# Altium PCB PCB1.pcbdoc (part 1 of 2)
Units mil, origin at the board's own origin, x right, y up, seen from the top; angles counter-clockwise.
Board outline 5555 x 3675 mil, 2 copper layers (Top Layer, Bottom Layer); 152 components, 190 nets, 571 pads, 310 vias.
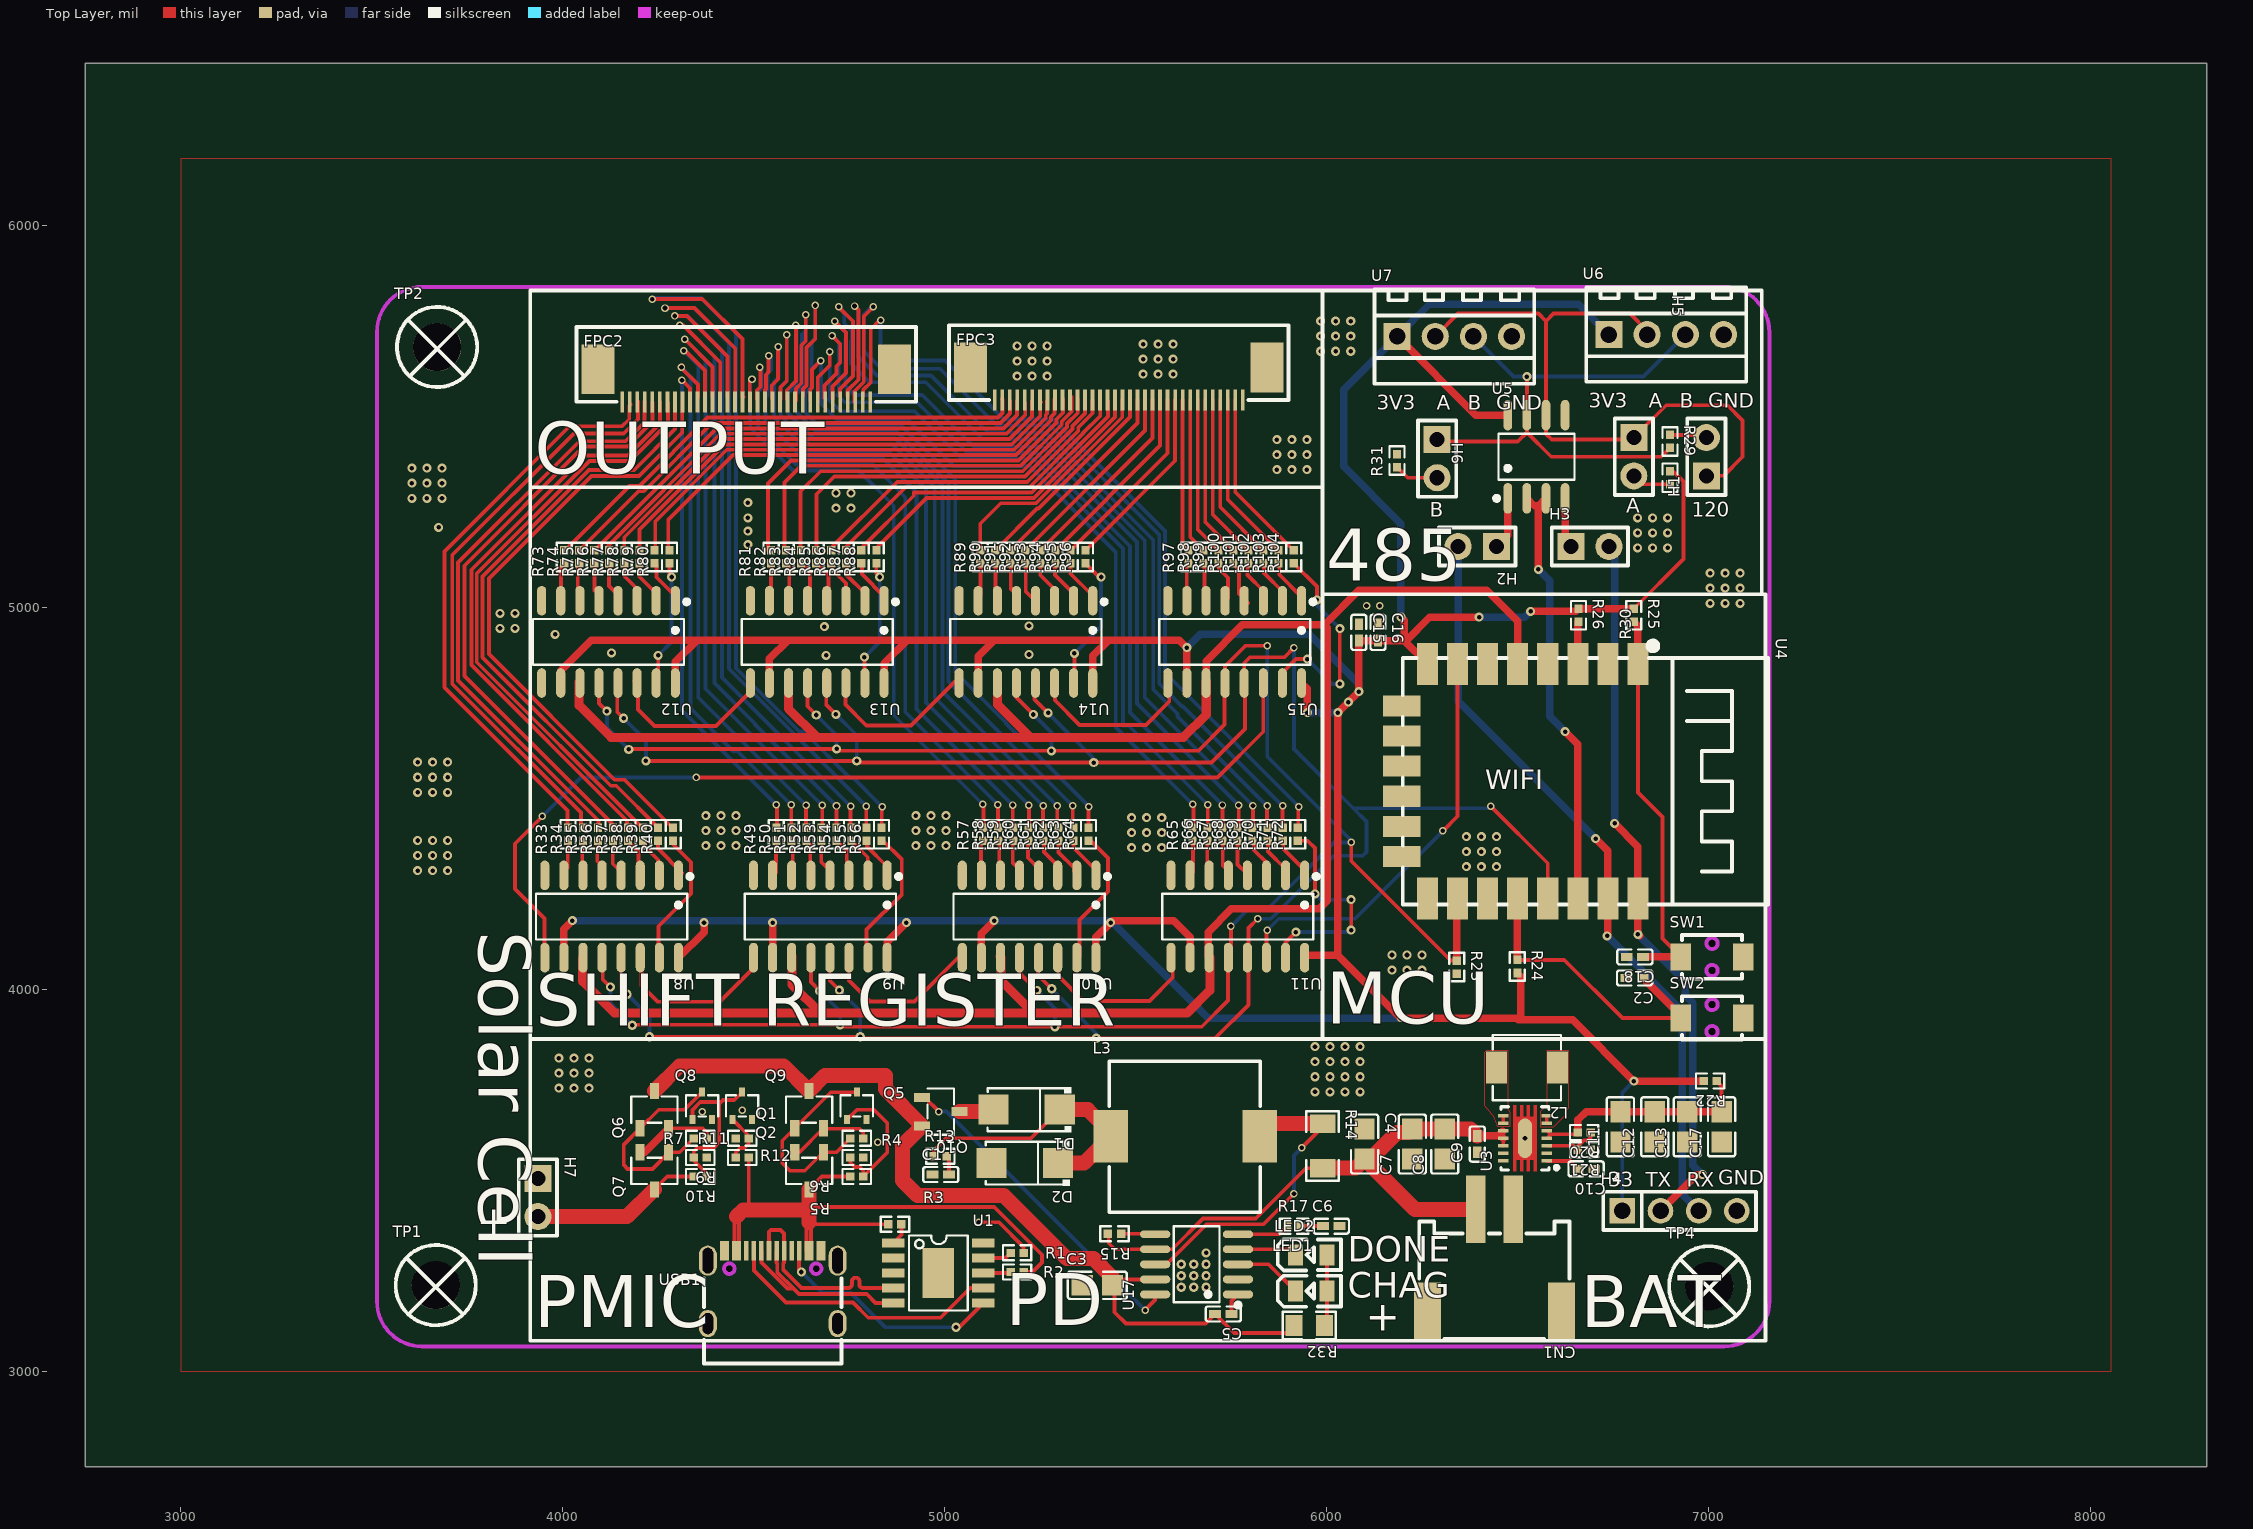
[diagram p0: Top Layer view]
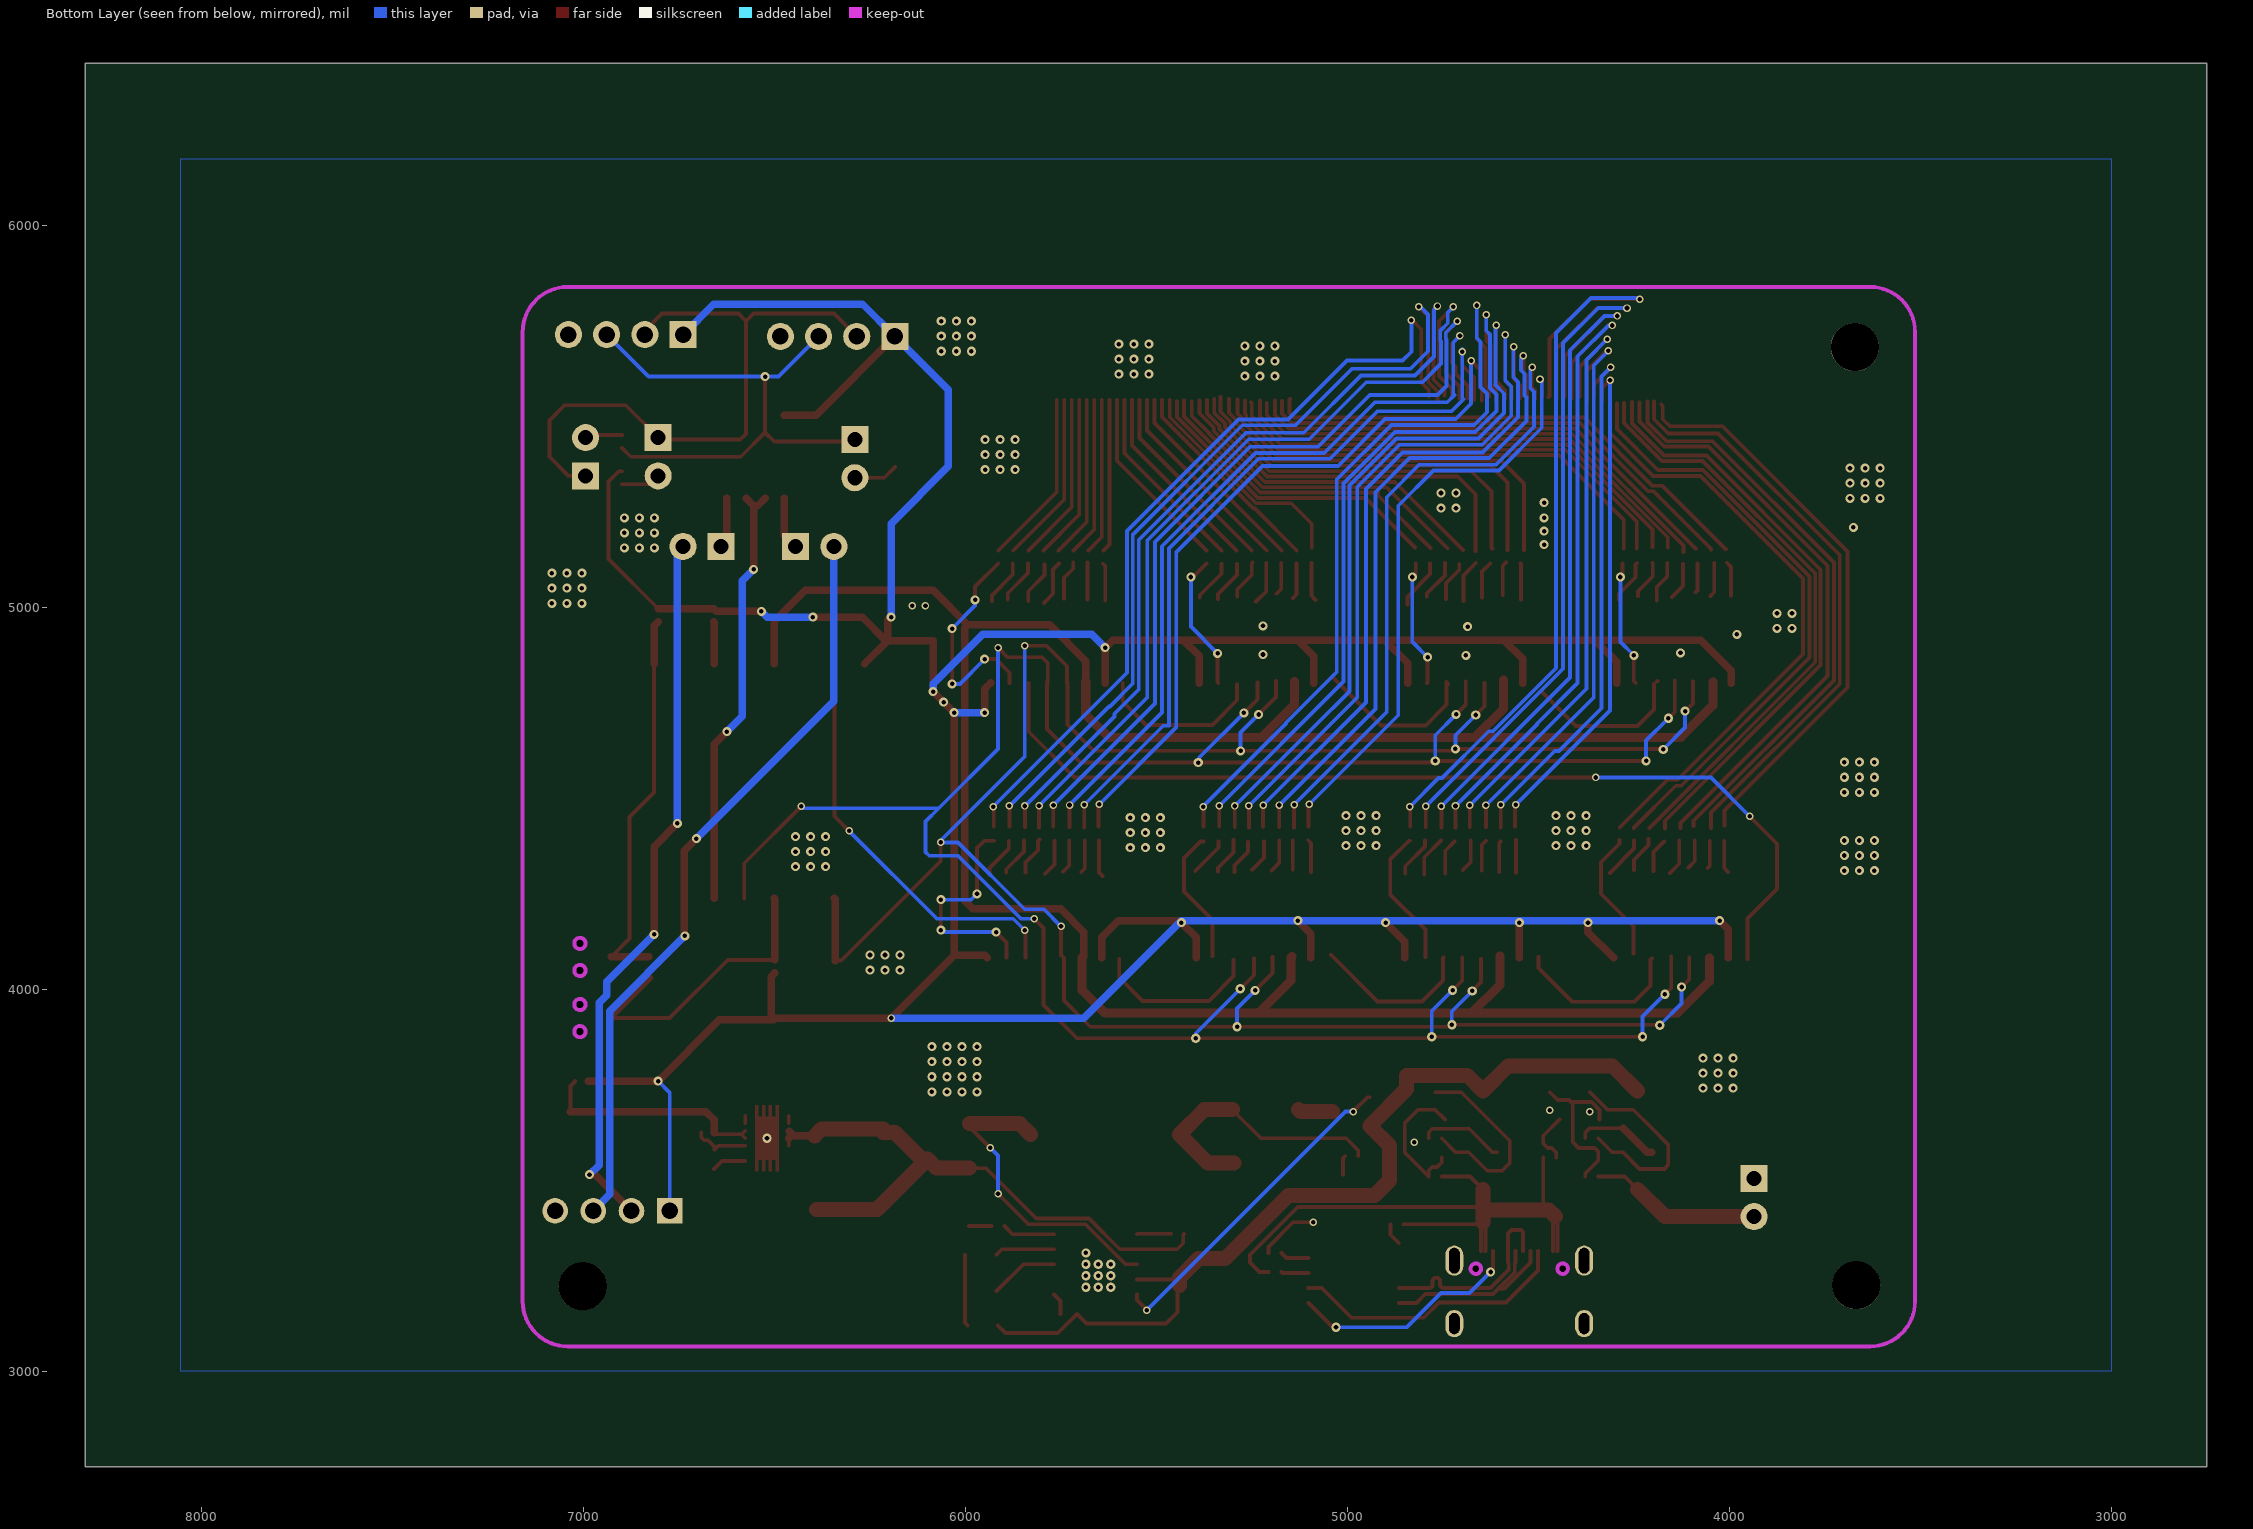
[diagram p1: Bottom Layer view, seen from below]

## Layer stack, top to bottom
Top Layer: signal copper (thickness not stored)
Dielectric: dielectric 12.6, FR-4, Dk 4.8
Bottom Layer: signal copper (thickness not stored)

## Board outline
8305,2750 2750,2750 2750,6425 8305,6425

## Design rules (kind name [scope] priority, off if disabled: settings)
Clearance copperThickness1oz [All] p1: gap=7 ignorepadtopadclearanceinfootprint=FALSE except(4: Track-Track; 6: Track-SMDPad SMDPad-SMDPad Track-THPad SMDPad-THPad THPad-THPad Track-Via SMDPad-Via THPad-Via Via-Via Track-Fill SMDPad-Fill THPad-Fill Via-Fill Fill-Fill SMDPad-Region THPad-Region Via-Region Fill-Region Region-Region Track-Poly SMDPad-Poly THPad-Poly Via-Poly Fill-Poly Poly-Poly Track-Text SMDPad-Text THPad-Text Via-Text Fill-Text Region-Text Poly-Text Text-Text Track-Hole SMDPad-Hole THPad-Hole Via-Hole Fill-Hole Region-Hole Poly-Hole Text-Hole; 11.8: Track-Region Region-Poly Track-Sheet SMDPad-Sheet THPad-Sheet Via-Sheet Fill-Sheet Region-Sheet Poly-Sheet Text-Sheet Sheet-Hole)
Clearance copperThickness2oz [All] p1: gap=7 ignorepadtopadclearanceinfootprint=FALSE except(6: Track-SMDPad SMDPad-SMDPad Track-THPad SMDPad-THPad THPad-THPad Track-Via SMDPad-Via THPad-Via Via-Via Track-Fill SMDPad-Fill THPad-Fill Via-Fill Fill-Fill SMDPad-Region THPad-Region Via-Region Fill-Region Region-Region Track-Poly SMDPad-Poly THPad-Poly Via-Poly Fill-Poly Poly-Poly Track-Text SMDPad-Text THPad-Text Via-Text Fill-Text Region-Text Poly-Text Text-Text Track-Hole SMDPad-Hole THPad-Hole Via-Hole Fill-Hole Region-Hole Poly-Hole Text-Hole; 8: Track-Track; 11.8: Track-Region Region-Poly Track-Sheet SMDPad-Sheet THPad-Sheet Via-Sheet Fill-Sheet Region-Sheet Poly-Sheet Text-Sheet Sheet-Hole)
DiffPairsRouting differentialPair [All] p1: maxuncoupledlength=10 minlimit=0 maxlimit=5.9843 mostfreqgap=5.9843 toplayer_minwidth=5 toplayer_prefwidth=10 toplayer_maxwidth=100 bottomlayer_minwidth=5 bottomlayer_prefwidth=10 bottomlayer_maxwidth=100
PasteMaskExpansion pasteMaskExpansion [All] p1: expansion=0
PlaneConnect innerPlane [All] p1: planeconnectstyle=Relief reliefexpansion=20 reliefentries=4 reliefconductorwidth=10 reliefairgap=10
PolygonConnect copperRegion [All] p1: connectstyle=Direct reliefentries=4 reliefconductorwidth=10 polygonreliefangle="90 Angle" airgapwidth=10
RoutingVias viaSize [All] p1: viastyle="Through Hole" holewidth=12.0078 minholewidth=11.811 maxholewidth=248.0314 width=24.0158 minwidth=19.685 maxwidth=393.7008
SolderMaskExpansion solderMaskExpansion [All] p1: useseparateexpansions=TRUE expansion=2.0079 expansionbottom=2.0079
Width copperThickness1oz [All] p1: maxlimit=100 minlimit=5 preferedwidth=10
Width copperThickness2oz [All] p1: maxlimit=100 minlimit=8 preferedwidth=10

## Components (designator, comment, footprint, x,y, rotation, side; value= is the part's Value field where it differs from the comment)
C1 "CAP_0402" C0402 4990,3515 r0 top
C2 "CAP_0402" C0402 6807.08,4030 r180 top
C3 "CAP_0805" C0805 5400,3225 r0 top
C4 "CAP_0805" C0805 6100,3595 r270 top
C5 "CAP_0402" C0402 5730,3150 r180 top
C6 "CAP_0402" C0402 6012.92,3380 r0 top
C7 "CAP_0805" C0805 6225,3595 r90 top
C8 "CAP_0805" C0805 6310,3595 r90 top
C9 "CAP_0402" C0402 6395,3595 r90 top
C10 "CAP_0402" C0402 6680,3530 r180 top
C11 "CAP_0805" C0805 6770,3640 r90 top
C12 "CAP_0805" C0805 6860,3640 r90 top
C13 "CAP_0805" C0805 6945,3640 r90 top
C15 "CAP_0402" C0402 6085,4935 r270 top
C16 "CAP_0402" C0402 6135,4935 r270 top
C17 "CAP_0805" C0805 7035,3640 r90 top
C18 "CAP_0402" C0402 6807.92,4085 r180 top
CN1 "HCZZ0021-2" CONN-SMD_2P-P2.50-A2501-WF-02A 6440,3290 r180 top
D1 "B340A" SMA_L4.3-W2.6-LS5.1-RD 5215,3685 r180 top
D2 "B340A" SMA_L4.3-W2.6-LS5.1-RD 5210,3545 r180 top
FPC2 "AFC07-S34FCC-00" FPC-SMD_P0.50-34P_LCSXJ-H2.0 4480.58,5581.57 r0 top
FPC3 "AFC07-S34FCC-00" FPC-SMD_P0.50-34P_LCSXJ-H2.0 5456.15,5586.01 r0 top
H1 "HDR-M_2.54_1x2P" HDR-TH_2P-P2.54-V-M-1 6995,5395 r90 top
H2 "HDR-M_2.54_1x2P" HDR-TH_2P-P2.54-V-M-1 6395,5160 r180 top
H3 "HDR-M_2.54_1x2P" HDR-TH_2P-P2.54-V-M-1 6690,5160 r0 top
H4 "HDR-M_2.54_1x4P" HDR-TH_4P-P2.54-V-M 6925,3420 r0 top
H5 "HDR-M_2.54_1x2P" HDR-TH_2P-P2.54-V-M-1 6805,5395 r270 top
H6 "HDR-M_2.54_1x2P" HDR-TH_2P-P2.54-V-M-1 6290,5390 r270 top
H7 "HDR-M_2.54_1x2P" HDR-TH_2P-P2.54-V-M-1 3935,3455 r270 top
L2 "MWSA0402S-2R2MT" IND-SMD_L4.4-W4.2 6525,3795 r180 top
L3 "YDRH104R-390M" IND-SMD_L10.1-W10.0 5630,3615 r0 top
LED1 "NCD0805R1" LED0805-R-RD 5960,3210 r0 top
LED2 "NCD0805R1" LED0805-R-RD 5960,3305 r0 top
Q1 "APM2301CAC-TRG" SOT-23-3_L2.9-W1.6-P1.90-LS2.8-BR 4645,3685 r270 top
Q2 "APM2301CAC-TRG" SOT-23-3_L2.9-W1.6-P1.90-LS2.8-BR 4645,3525 r90 top
Q5 "L2N7002WT1G" SC-70-3_L2.1-W1.3-P1.30-LS2.1-BR 4770,3695 r270 top
Q6 "APM2301CAC-TRG" SOT-23-3_L2.9-W1.6-P1.90-LS2.8-BR 4240,3685 r270 top
Q7 "APM2301CAC-TRG" SOT-23-3_L2.9-W1.6-P1.90-LS2.8-BR 4240,3525 r90 top
Q8 "L2N7002WT1G" SC-70-3_L2.1-W1.3-P1.30-LS2.1-BR 4365,3695 r270 top
Q9 "L2N7002WT1G" SC-70-3_L2.1-W1.3-P1.30-LS2.1-BR 4470,3695 r270 top
Q10 "APM2301CAC-TRG" SOT-23-3_L2.9-W1.6-P1.90-LS2.8-BR 4990,3680 r180 top
R1 "Res_0402" R0402 5190,3310 r180 top
R2 "Res_0402" R0402 5190,3260 r180 top
R3 "Res_0402" R0402 4870,3385 r180 top
R4 "Res_0402" R0402 4770,3610 r0 top
R5 "Res_0402" R0402 4770,3510 r180 top
R6 "Res_0402" R0402 4770,3560 r180 top
R7 "Res_0402" R0402 4360,3610 r0 top
R9 "Res_0402" R0402 4360,3560 r180 top
R10 "Res_0402" R0402 4360,3510 r180 top
R11 "Res_0402" R0402 4470,3610 r0 top
R12 "Res_0402" R0402 4470,3560 r0 top
R13 "Res_0402" R0402 4988.9,3563.16 r0 top
R14 "Res_1206" R1206 5990,3590 r270 top
R15 "Res_0402" R0402 5445,3360 r180 top
R17 "Res_0402" R0402 5915,3380 r0 top
R20 "Res_0402" R0402 6675,3625 r180 top
R21 "Res_0402" R0402 6675,3580 r180 top
R22 "Res_0402" R0402 7005,3760 r180 top
R23 "Res_0402" R0402 6341.44,4058.56 r270 top
R24 "Res_0402" R0402 6500,4060 r270 top
R25 "Res_0402" R0402 6805,4980 r270 top
R26 "Res_0402" R0402 6660,4980 r270 top
R29 "Res_0402" R0402 6900,5435 r270 top
R30 "Res_0402" R0402 6900,5340 r90 top
R31 "Res_0402" R0402 6185,5385 r90 top
R32 "0805W8F4701T5E" R0805 5955,3120 r180 top
R33 "Res_0402" R0402 4013.52,4406.31 r90 top
R34 "Res_0402" R0402 4052.89,4406.31 r90 top
R35 "Res_0402" R0402 4092.26,4406.31 r90 top
R36 "Res_0402" R0402 4131.63,4406.31 r90 top
R37 "Res_0402" R0402 4171,4406.31 r90 top
R38 "Res_0402" R0402 4210.37,4406.31 r90 top
R39 "Res_0402" R0402 4249.74,4406.31 r90 top
R40 "Res_0402" R0402 4289.11,4406.31 r90 top
R49 "Res_0402" R0402 4559.37,4406.31 r90 top
R50 "Res_0402" R0402 4598.74,4406.31 r90 top
R51 "Res_0402" R0402 4638.11,4406.31 r90 top
R52 "Res_0402" R0402 4677.48,4406.31 r90 top
R53 "Res_0402" R0402 4716.85,4406.31 r90 top
R54 "Res_0402" R0402 4756.22,4406.31 r90 top
R55 "Res_0402" R0402 4795.59,4406.31 r90 top
R56 "Res_0402" R0402 4834.96,4406.31 r90 top
R57 "Res_0402" R0402 5101.29,4406.31 r90 top
R58 "Res_0402" R0402 5140.66,4406.31 r90 top
R59 "Res_0402" R0402 5180.03,4406.31 r90 top
R60 "Res_0402" R0402 5219.4,4406.31 r90 top
R61 "Res_0402" R0402 5258.77,4406.31 r90 top
R62 "Res_0402" R0402 5298.14,4406.31 r90 top
R63 "Res_0402" R0402 5337.51,4406.31 r90 top
R64 "Res_0402" R0402 5376.88,4406.31 r90 top
R65 "Res_0402" R0402 5649.43,4406.31 r90 top
R66 "Res_0402" R0402 5688.8,4406.31 r90 top
R67 "Res_0402" R0402 5728.17,4406.31 r90 top
R68 "Res_0402" R0402 5767.54,4406.31 r90 top
R69 "Res_0402" R0402 5806.91,4406.31 r90 top
R70 "Res_0402" R0402 5846.28,4406.31 r90 top
R71 "Res_0402" R0402 5885.65,4406.31 r90 top
R72 "Res_0402" R0402 5925.02,4406.31 r90 top
R73 "Res_0402" R0402 4003.82,5132.65 r90 top
R74 "Res_0402" R0402 4043.19,5132.65 r90 top
R75 "Res_0402" R0402 4082.56,5132.65 r90 top
R76 "Res_0402" R0402 4121.93,5132.65 r90 top
R77 "Res_0402" R0402 4161.31,5132.65 r90 top
R78 "Res_0402" R0402 4200.68,5132.65 r90 top
R79 "Res_0402" R0402 4240.05,5132.65 r90 top
R80 "Res_0402" R0402 4279.42,5132.65 r90 top
R81 "Res_0402" R0402 4545.63,5132.65 r90 top
R82 "Res_0402" R0402 4585,5132.65 r90 top
R83 "Res_0402" R0402 4624.37,5132.65 r90 top
R84 "Res_0402" R0402 4663.74,5132.65 r90 top
R85 "Res_0402" R0402 4703.11,5132.65 r90 top
R86 "Res_0402" R0402 4742.48,5132.65 r90 top
R87 "Res_0402" R0402 4781.85,5132.65 r90 top
R88 "Res_0402" R0402 4821.22,5132.65 r90 top
R89 "Res_0402" R0402 5093.26,5132.65 r90 top
R90 "Res_0402" R0402 5132.63,5132.65 r90 top
R91 "Res_0402" R0402 5172,5132.65 r90 top
R92 "Res_0402" R0402 5211.37,5132.65 r90 top
R93 "Res_0402" R0402 5250.74,5132.65 r90 top
R94 "Res_0402" R0402 5290.11,5132.65 r90 top
R95 "Res_0402" R0402 5329.48,5132.65 r90 top
R96 "Res_0402" R0402 5368.85,5132.65 r90 top
R97 "Res_0402" R0402 5638.78,5132.65 r90 top
R98 "Res_0402" R0402 5678.15,5132.65 r90 top
R99 "Res_0402" R0402 5717.52,5132.65 r90 top
R100 "Res_0402" R0402 5756.89,5132.65 r90 top
R101 "Res_0402" R0402 5796.26,5132.65 r90 top
R102 "Res_0402" R0402 5835.63,5132.65 r90 top
R103 "Res_0402" R0402 5875,5132.65 r90 top
R104 "Res_0402" R0402 5914.37,5132.65 r90 top
SW1 "TS-KG88C-ACT25F" KEY-SMD_L4.0-W2.9-LS4.8 7010,4085 r0 top
SW2 "TS-KG88C-ACT25F" KEY-SMD_L4.0-W2.9-LS4.8 7010,3925 r0 top
TP1 "M3螺丝" M3螺丝 3669.88,3223.03 r0 top
TP2 "M3螺丝" M3螺丝 3673.37,5679.82 r0 top
TP4 "M3螺丝" M3螺丝 7005.02,3219.98 r0 top
U1 "CH224K" ESSOP-10_L4.9-W3.9-P1.0-LS6.0-TL-EP 4983.66,3257.37 r270 top
U3 "TPS63020DSJT" VSON-14_L4.0-W3.0-P0.50-BL-EP_TI_DSJ 6520,3610 r90 top
U4 "SMDESP8266-12F" WIFIM-SMD_22P-L24.0-W16.0-P2.00-SMDESP8266-12F 6506.83,4545.23 r270 top
U5 "MAX3485ESA" SOP-8_L5.0-W4.0-P1.27-LS6.0-BL 6550,5395 r0 top
U6 "DB125-2.54-4P-GN-S" CONN-TH_DB125-2.54-4P-GN 6890,5715 r0 top
U7 "DB125-2.54-4P-GN-S" CONN-TH_DB125-2.54-4P-GN 6335,5710 r0 top
U8 "74HC595D_C431479" SOIC-16_L9.9-W3.9-P1.27-LS6.0-BL 4127.99,4190.85 r180 top
U9 "74HC595D_C431479" SOIC-16_L9.9-W3.9-P1.27-LS6.0-BL 4674.66,4190.85 r180 top
U10 "74HC595D_C431479" SOIC-16_L9.9-W3.9-P1.27-LS6.0-BL 5221.33,4190.85 r180 top
U11 "74HC595D_C431479" SOIC-16_L9.9-W3.9-P1.27-LS6.0-BL 5767.99,4190.85 r180 top
U12 "74HC595D_C431479" SOIC-16_L9.9-W3.9-P1.27-LS6.0-BL 4119.72,4910.16 r180 top
U13 "74HC595D_C431479" SOIC-16_L9.9-W3.9-P1.27-LS6.0-BL 4666.39,4910.16 r180 top
U14 "74HC595D_C431479" SOIC-16_L9.9-W3.9-P1.27-LS6.0-BL 5213.05,4910.16 r180 top
U15 "74HC595D_C431479" SOIC-16_L9.9-W3.9-P1.27-LS6.0-BL 5759.72,4910.16 r180 top
U17 "CN3781" SSOP-10_L4.9-W3.9-P1.00-LS6.0-BL 5660,3280 r90 top
USB1 "USB_TYPE-C-16P" USB_TYPE-C-16P 4545,3220 r0 top

## Footprints (in the part's own frame and the unit in brackets; to place one, negate y for a bottom-side part, rotate by r counter-clockwise, add the part's x,y. Pads: shape width x height; smd on the part's side, far side on the other; paste and mask are expansions set on the pad)
C0402 [mm]
  rect 0.79x0.54 smd: 1(-0.545,0) 2(0.545,0)
  silkscreen extent -1.17,-0.5 1.17,0.5
C0805 [mm]
  rect 1.41x1.35 smd: 1(-1,0) 2(1,0)
  silkscreen extent -1.96,-0.9 1.96,0.9
CONN-SMD_2P-P2.50-A2501-WF-02A [mm]
  rect 1.3x4.5 smd: 1(-1.25,-3.4) 2(1.25,-3.4)
  rect 1.8x3.9 smd: 3(-4.45,3.4) 4(4.45,3.4)
  silkscreen extent -5,-2.6 5,5.2
CONN-TH_DB125-2.54-4P-GN [mm]
  rect 1.8x1.8 hole 1.1: 1(-3.81,0)
  round 1.8 hole 1.1: 2(-1.27,0) 3(1.27,0) 4(3.81,0)
  silkscreen extent -5.32,-3.14 5.32,3.14
ESSOP-10_L4.9-W3.9-P1.0-LS6.0-TL-EP [mm]
  rect 0.6x1.5 smd: 1(-2,-3) 2(-1,-3) 3(0,-3) 4(1,-3) 5(2,-3) 6(2,3) 7(1,3) 8(0,3) 9(-1,3) 10(-2,3)
  rect 3.3x2.1 smd: 11(0,0)
  silkscreen extent -2.5,-1.95 2.5,1.95
FPC-SMD_P0.50-34P_LCSXJ-H2.0 [mm]
  rect 0.25x1.4 smd: 1(-8.247,-1.087) 2(-7.747,-1.087) 3(-7.247,-1.087) 4(-6.747,-1.087) 5(-6.247,-1.087) 6(-5.747,-1.087) 7(-5.247,-1.087) 8(-4.747,-1.087) 9(-4.247,-1.087) 10(-3.747,-1.087) 11(-3.247,-1.087) 12(-2.747,-1.087) 13(-2.247,-1.087) 14(-1.747,-1.087) 15(-1.247,-1.087) 16(-0.747,-1.087) 17(-0.247,-1.087) 18(0.251,-1.085) 19(0.751,-1.085) 20(1.251,-1.085) 21(1.751,-1.085) 22(2.251,-1.085) 23(2.751,-1.085) 24(3.251,-1.085) 25(3.751,-1.085) 26(4.251,-1.085) 27(4.751,-1.085) 28(5.251,-1.085) 29(5.751,-1.085) 30(6.251,-1.085) 31(6.751,-1.085) 32(7.253,-1.087) 33(7.753,-1.087) 34(8.248,-1.084)
  rect 2.2x3.3 smd: 35(-9.85,1.087) 36(9.85,1.087)
  silkscreen extent -11.3,-1.09 11.3,3.9
HDR-TH_2P-P2.54-V-M-1 [mm]
  rect 1.8x1.8 hole 1: 1(-1.27,0)
  round 1.8 hole 1: 2(1.27,0)
  silkscreen extent -2.54,-1.27 2.54,1.27
HDR-TH_4P-P2.54-V-M [mm]
  rect 1.7x1.7 hole 1.1: 1(-3.81,0)
  round 1.7 hole 1.1: 2(-1.27,0) 3(1.27,0) 4(3.81,0)
  silkscreen extent -5.08,-1.27 5.08,1.27
IND-SMD_L4.4-W4.2 [mm]
  rect 1.4x2.12 smd: 1(2.028,0) 2(-2.028,0)
  silkscreen extent -2.28,-2.18 2.28,2.18
IND-SMD_L10.1-W10.0 [mm]
  rect 2.3x3.5 smd: 1(-4.95,0) 2(4.95,0)
  silkscreen extent -5.05,-5.05 5,5
KEY-SMD_L4.0-W2.9-LS4.8 [mm]
  rect 1.35x1.8 smd: 1(-2.08,0) 2(2.08,0)
  Multi-Layer board cut-out: 0.375,0.9 0.322,1.085 0.186,1.22 0,1.269 -0.186,1.22 -0.323,1.085 -0.375,0.9 -0.375,0.9 -0.323,0.715 -0.186,0.58 0,0.531 0.186,0.58 0.322,0.715 0.375,0.9
  Multi-Layer board cut-out: 0.375,-0.9 0.322,-0.715 0.186,-0.58 0,-0.531 -0.186,-0.58 -0.323,-0.715 -0.375,-0.9 -0.375,-0.9 -0.323,-1.085 -0.186,-1.22 0,-1.269 0.186,-1.22 0.322,-1.085 0.375,-0.9
  Multi-Layer keep-out circle w0.254: c0,0.9 r0.375
  Multi-Layer keep-out circle w0.254: c0,-0.9 r0.375
  silkscreen extent -2,-1.45 2,1.45
LED0805-R-RD [mm]
  rect 1x1.4 smd: 1(1.05,0) 2(-1.05,0)
  silkscreen extent -2.22,-1.04 1.99,1.01
M3螺丝 [mil]
  round 126 hole 126: 1(-2.5,2.5)
  silkscreen extent -107,-102 102,107
R0402 [mm]
  rect 0.566x0.54 smd: 1(-0.433,0) 2(0.433,0)
  silkscreen extent -0.94,-0.5 0.94,0.5
R0805 [mm]
  rect 1.133x1.377 smd: 1(-1,0) 2(1,0)
  silkscreen extent -1.76,-0.92 1.76,0.92
R1206 [mil]
  rect 47.54x66.97 smd: 1(-58.22,0) 2(58.22,0)
  silkscreen extent -91,-42 91,42
SC-70-3_L2.1-W1.3-P1.30-LS2.1-BR [mm]
  rect 0.6x0.4 smd: 1(0.91,-0.65) 2(0.91,0.65) 3(-0.91,0)
  silkscreen extent -0.7,-1.08 0.7,1.08
SMA_L4.3-W2.6-LS5.1-RD [mm]
  rect 2x2 smd: 1(-2.2,0) 2(2.2,0)
  silkscreen extent -2.98,-1.5 2.6,1.5
SOIC-16_L9.9-W3.9-P1.27-LS6.0-BL [mil]
  oval 23.7x77.6 smd: 1(-175,-107.7) 2(-125,-107.7) 3(-75,-107.7) 4(-25,-107.7) 5(25,-107.7) 6(75,-107.7) 7(125,-107.7) 8(175,-107.7) 9(175,107.7) 10(125,107.7) 11(75,107.7) 12(25,107.7) 13(-25,107.7) 14(-75,107.7) 15(-125,107.7) 16(-175,107.7)
  silkscreen extent -211,-111 198,60
SOP-8_L5.0-W4.0-P1.27-LS6.0-BL [mil]
  oval 22.6x80.14 smd: 1(-75,-108.97) 2(-25,-108.97) 3(25,-108.97) 4(75,-108.97) 5(75,108.97) 6(25,108.97) 7(-25,108.97) 8(-75,108.97)
  silkscreen extent -110,-115 99,60
SOT-23-3_L2.9-W1.6-P1.90-LS2.8-BR [mm]
  rect 1.07x0.6 smd: 1(1.235,-0.95) 2(1.235,0.95) 3(-1.235,0)
  silkscreen extent -0.88,-1.54 0.88,1.54
SSOP-10_L4.9-W3.9-P1.00-LS6.0-BL [mm]
  oval 0.525x2.014 smd: 1(-2,-2.757) 2(-1,-2.757) 3(0,-2.757) 4(1,-2.757) 5(2,-2.757) 6(2,2.757) 7(1,2.757) 8(0,2.757) 9(-1,2.757) 10(-2,2.757)
  silkscreen extent -2.86,-2.91 2.53,1.52
USB_TYPE-C-16P [mm]
  oval 1.2x2 hole 0.7 slot 1.7 at 90 deg: 1(-4.193,1.765) 2(4.447,1.765)
  oval 1.2x1.8 hole 0.7 slot 1.4 at 90 deg: 3(-4.193,-2.415) 4(4.447,-2.415)
  rect 0.3x1.3 smd: A1(-3.223,2.415) A4(-2.423,2.415) A5(-1.123,2.415) A6(-0.123,2.415) A7(0.377,2.415) A8(1.377,2.415) A9(2.677,2.415) A12(3.477,2.415) B1(3.177,2.415) B4(2.377,2.415) B5(1.877,2.415) B6(0.877,2.415) B7(-0.623,2.415) B8(-1.623,2.415) B9(-2.123,2.415) B12(-2.923,2.415)
  Multi-Layer board cut-out: -2.413,1.235 -2.448,1.387 -2.545,1.509 -2.685,1.576 -2.841,1.576 -2.981,1.509 -3.078,1.387 -3.113,1.235 -3.113,1.235 -3.078,1.083 -2.981,0.961 -2.841,0.894 -2.685,0.894 -2.545,0.961 -2.448,1.083 -2.413,1.235
  Multi-Layer board cut-out: 3.367,1.235 3.332,1.387 3.235,1.509 3.095,1.576 2.939,1.576 2.799,1.509 2.702,1.387 2.667,1.235 2.667,1.235 2.702,1.083 2.799,0.961 2.939,0.894 3.095,0.894 3.235,0.961 3.332,1.083 3.367,1.235
  Multi-Layer keep-out circle w0.254: c-2.763,1.235 r0.35
  Multi-Layer keep-out circle w0.254: c3.017,1.235 r0.35
  silkscreen extent -4.45,-5.08 4.7,0.57
VSON-14_L4.0-W3.0-P0.50-BL-EP_TI_DSJ [mm]
  rect 0.25x0.7 smd: 1(-1.5,-1.45) 2(-1,-1.45) 3(-0.5,-1.45) 4(0,-1.45) 5(0.5,-1.45) 6(1,-1.45) 7(1.5,-1.45) 8(1.5,1.45) 9(1,1.45) 10(0.5,1.45) 11(0,1.45) 12(-0.5,1.45) 13(-1,1.45) 14(-1.5,1.45)
  oval 2.64x0.948 smd: 15(0,0)
  Top Layer region: -2.2,0.79 -2.2,0.59 -1.43,0.59 -1.43,0.33 -2.2,0.33 -2.2,0.13 -1.43,0.13 -1.43,-0.13 -2.2,-0.13 -2.2,-0.33 -1.43,-0.33 -1.43,-0.59 -2.2,-0.59 -2.2,-0.79 2.2,-0.79 2.2,-0.59 1.43,-0.59 1.43,-0.33 2.2,-0.33 2.2,-0.13 1.43,-0.13 1.43,0.13 2.2,0.13 2.2,0.33 1.43,0.33 1.43,0.59 2.2,0.59 2.2,0.79
  silkscreen extent -2.1,-2.23 2.1,1.6
WIFIM-SMD_22P-L24.0-W16.0-P2.00-SMDESP8266-12F [mm]
  rect 2.8x1.4 smd: 1(-7.8,7.85) 2(-7.8,5.85) 3(-7.8,3.85) 4(-7.8,1.85) 5(-7.8,-0.15) 6(-7.8,-2.15) 7(-7.8,-4.15) 8(-7.8,-6.15) 15(7.8,-6.15) 16(7.8,-4.15) 17(7.8,-2.15) 18(7.8,-0.15) 19(7.8,1.85) 20(7.8,3.85) 21(7.8,5.85) 22(7.8,7.85)
  rect 1.4x2.5 smd: 9(-5,-7.85) 10(-3,-7.85) 11(-1,-7.85) 12(1,-7.85) 13(3,-7.85) 14(5,-7.85)
  silkscreen extent -9.23,-7.8 8.2,16.5

## Via types
v1: diameter 23.62, hole 12.01, Top Layer to Bottom Layer, 204 vias
v2: diameter 19.68, hole 12.01, Top Layer to Bottom Layer, 69 vias
v3: diameter 24.02, hole 12.01, Top Layer to Bottom Layer, 37 vias

## Nets (pads, with @x,y where several pads share a name; then routed paths per layer and width w, separated by ;. In a path a pad name is that pad's centre, name@x,y a point inside that pad or via, vN(x,y) a via of type N, cw(c..) or ccw(c..) an arc to the next point about the centre after c; other vN are vias at no path point)
485_A: H1.1 H5.1 U5.6 U6.2 U7.2 | length 1705.8
  Top Layer w10: U7.2@6285,5710 6345,5770 6555,5770 6575,5750 ; U6.2@6840,5715 6840,5725 6795,5770 6595,5770 6575,5750 ; H1.1@6995,5345 7040,5345 7090,5395 7090,5490 7050,5530 6890,5530 H5.1@6805,5445 6800,5440 6590,5440 6575,5455 U5.6@6575,5503.97 6575,5750
485_B: H6.1 R29.2 U5.7 U6.3 U7.3 | length 1448.1
  Top Layer w10: H6.1@6290,5440 6295,5435 6501.1,5435 6525,5458.9 ; v1(6525,5605) U5.7@6525,5503.97 6525,5458.9 ; R29.2@6900,5417.96 6877.04,5395 6588.9,5395 6525,5458.9
  Bottom Layer w10: U7.3@6385,5710 6490,5605 v1(6525,5605) 6830,5605 U6.3@6940,5715
485_DI: H3.1 U5.4 | length 132.2
  Top Layer w19.68: U5.4@6625,5286.03 6625,5175 H3.1@6640,5160
485_RO: H2.1 U5.1 | length 138.5
  Top Layer w19.68: H2.1@6445,5160 6475,5190 U5.1@6475,5286.03
485CRTL: U4.20 U5.2 U5.3 | length 1137.3
  Top Layer w19.68: U5.2@6525,5286.03 6545,5266.03 6555,5266.03 ; v1(6555,5100) 6555,5266.03 ; U5.3@6575,5286.03 6555,5266.03 ; v1(6625,4675) 6658.4,4641.6 U4.20@6658.4,4238.15
  Bottom Layer w19.68: v1(6555,5100) 6585,5070 6585,4715 v1(6625,4675)
595G: U4.19 U8.13 U9.13 U10.13 U11.13 U12.13 U13.13 U14.13 U15.13 | length 6927.4
  Top Layer w10: U12.13@4142.77,4809.17 4142.77,4726.66 v3(4159.27,4710.16) ; U8.13@4152.03,4086.54 4152.03,4004.03 v3(4168.53,3987.53) ; v3(4217.66,4598.45) v3(4769.85,4598.45) 4773.66,4594.64 v3@5389.73,4594.64 ; v3(4226.92,3875.82) v3(4779.11,3875.82) 4782.92,3872.01 v3(5397.31,3872.01) 5708.31,3872.01 5795.9,3959.6 5795.9,4160.9 v2(5820,4185) ; U13.13@4689.88,4806.63 4689.88,4745.7 v3(4715.27,4720.31) ; U9.13@4699.14,4084 4699.14,4023.07 v3(4724.53,3997.68) ; U14.13@5235.72,4804.09 5235.72,4759.67 v3(5271.26,4724.12) ; U10.13@5244.98,4081.46 5244.98,4037.03 v3(5280.52,4001.49) ; v3(5390.51,4593.87) v3@5389.73,4594.64 ; U15.13@5784.72,4802.46 5784.72,4854.72 5800,4870 5890,4870 v2(5915,4895) ; U15.13@5786.64,4805.36 5786.64,4682.23 5699.05,4594.64 v3@5389.73,4594.64 ; v2(6430,4480) 6579.66,4330.34 U4.19@6579.66,4238.15
  Bottom Layer w10: v3(4159.27,4710.16) 4217.66,4651.77 v3(4217.66,4598.45) ; v3(4168.53,3987.53) 4226.92,3929.13 v3(4226.92,3875.82) ; v3(4715.27,4720.31) 4769.85,4665.73 v3(4769.85,4598.45) ; v3(4724.53,3997.68) 4779.11,3943.1 v3(4779.11,3875.82) ; v3(5271.26,4724.12) 5388.05,4607.34 5388.05,4596.33 v3(5390.51,4593.87) ; v3(5280.52,4001.49) 5397.31,3884.7 v3(5397.31,3872.01) ; v2@5820,4190 v2(5820,4185) 5855,4185 6020,4350 6095,4350 6105,4360 6105,4440 6070.38,4474.62 ; v2(5915,4895) 5915,4630 6070.38,4474.62 ; v2(6430,4480) 6424.62,4474.62 6070.38,4474.62
595OUT1: U8.9 U15.14 | length 2542.9
  Top Layer w10: v2(3946.22,4453.01) 3874.73,4381.52 3874.73,4263.4 3952.44,4185.69 U8.9@3952.44,4080.01 ; v2(4350,4555) 5715,4555 5834.72,4674.72 U15.14@5834.72,4802.46
  Bottom Layer w10: v2(3946.22,4453.01) 4048.21,4555 v2(4350,4555)
$1N658: R1.2 U1.9 | length 76.7
  Top Layer w10: U1.9@5101.78,3296.73 5159.69,3296.73 R1.2@5172.96,3310
$1N766: R2.2 U1.8 | length 72.3
  Top Layer w10: U1.8@5101.78,3257.36 5170.32,3257.36 R2.2@5172.96,3260
$1N856: R3.1 U1.1 | length 57.8
  Top Layer w10: U1.1@4865.55,3336.1 4887.04,3357.59 R3.1@4887.04,3385
$1N1170: Q1.2 Q2.2 R4.2 | length 225.5
  Top Layer w10: Q2.2@4607.6,3573.62 4619.65,3573.62 Q1.2@4682.4,3636.38 4683.77,3635 4777.67,3635 4787.04,3625.63 R4.2@4787.04,3610
$1N1187: Q1.1 Q2.1 Q5.3 R4.1 | length 527.9
  Top Layer w10: R4.1@4752.96,3610 4716.59,3573.62 Q2.1@4682.4,3573.62 4633.77,3525 4595,3525 4575,3545 4575,3603.78 Q1.1@4607.6,3636.38 4702.05,3730.82 Q5.3@4770,3730.82
$1N1319: Q5.1 R5.1 R6.2 | length 368.4
  Top Layer w10: Q5.1@4744.41,3659.18 4770.23,3685 4815,3685 4850,3650 4850,3572.96 R5.1@4787.04,3510 4787.04,3525.63 4777.67,3535 4765,3535 4752.96,3547.04 R6.2@4752.96,3560
$1N1590: Q6.2 Q7.2 R7.2 | length 220.5
  Top Layer w10: Q6.2@4277.4,3636.38 4366.3,3636.38 4377.04,3625.63 R7.2@4377.04,3610
  Top Layer w19.68: Q7.2@4202.6,3573.62 4214.65,3573.62 Q6.2@4277.4,3636.38
$1N1594: Q6.1 Q7.1 Q8.3 R7.1 | length 536.5
  Top Layer w10: R7.1@4342.96,3610 4306.59,3573.62 Q7.1@4277.4,3573.62 4277.4,3572.4 4235,3530 4170,3530 4160,3540 4160,3593.78 Q6.1@4202.6,3636.38 4251.23,3685 4319.18,3685 Q8.3@4365,3730.82
$1N1749: Q8.1 Q9.3 R9.2 R10.1 | length 439
  Top Layer w10: Q8.1@4339.41,3659.18 4339.41,3684.41 4360,3705 4415,3705 ; R10.1@4377.04,3510 4377.04,3517.96 4342.96,3552.04 R9.2@4342.96,3560 4342.96,3575.63 4352.33,3585 4395,3585 4410,3600 4410,3700 4415,3705 ; Q9.3@4470,3730.82 4449.18,3710 4420,3710 4415,3705
$1N1854: Q9.1 R11.2 R12.1 | length 137
  Top Layer w10: Q9.1@4444.41,3659.18 4487.04,3616.55 R11.2@4487.04,3610 4487.04,3596.73 4475.31,3585 4465,3585 4452.96,3572.96 R12.1@4452.96,3560
$1N2028: D1.2 Q10.3 | length 91.8
  Top Layer w39.37: Q10.3@5038.62,3680 5123.39,3680 D1.2@5128.39,3685
$1N2189: D1.1 D2.1 L3.1 R13.1 | length 729.4
  Top Layer w10: R13.1@4971.86,3563.16 4971.86,3578.79 5003.07,3610 5226.62,3610 D1.1@5301.62,3685
  Top Layer w39.37: D2.1@5296.62,3545 5365.11,3545 5440.11,3620 5375.12,3685 D1.1@5301.62,3685
$1N2283: C1.2 R13.2 | length 50.4
  Top Layer w10: R13.2@5005.94,3563.16 5011.46,3557.64 C1.2@5011.46,3515
$1N2799: C5.1 U17.1 | length 58.3
  Top Layer w10: C5.1@5751.46,3150 5751.46,3184.19 U17.1@5768.53,3201.26
$1N3014: C6.1 R17.2 | length 59.4
  Top Layer w10: R17.2@5932.04,3380 C6.1@5991.46,3380
$1N3018: R17.1 U17.5 | length 138.2
  Top Layer w10: U17.5@5768.53,3358.74 5876.7,3358.74 R17.1@5897.96,3380
$1N3436: L2.1 U3.8 U3.9 | length 19.7
  Top Layer w10: U3.9@6462.91,3649.37 U3.8@6462.91,3669.06
$1N3447: L2.2 U3.6 U3.7 | length 19.7
  Top Layer w10: U3.6@6577.09,3649.37 U3.7@6577.09,3669.06
$1N3661: C10.2 U3.1 | length 90.1
  Top Layer w10: U3.1@6577.09,3550.94 6637.6,3550.94 C10.2@6658.54,3530
$1N3995: R20.1 R21.2 U3.3 | length 150.1
  Top Layer w10: U3.3@6577.09,3590.32 6647.64,3590.32 R21.2@6657.96,3580 6657.96,3587.96 6675,3605 6685,3605 6692.04,3612.04 R20.1@6692.04,3625
$1N4301: C11.2 C12.2 C13.2 C17.2 R20.2 R22.1 U3.4 U3.5 | length 599.3
  Top Layer w10: U3.4@6577.09,3610 6582.38,3615.29 ; U3.5@6577.09,3629.69 6586.21,3620.57 6653.53,3620.57 R20.2@6657.96,3625 ; R22.1@7022.04,3760 7035,3747.04 C17.2@7035,3679.37
  Top Layer w19.68: R20.2@6657.96,3625 6657.96,3657.96 6680,3680 6769.37,3680 C11.2@6770,3679.37 C12.2@6860,3679.37 C13.2@6945,3679.37 C17.2@7035,3679.37
$1N6447: LED1.1 LED2.1 R32.1 | length 187.9
  Top Layer w10: R32.1@5994.37,3120 6001.35,3126.98 LED1.1@6001.35,3210 LED2.1@6001.35,3305
$1N11189: Q10.1 U17.10 | length 866.7
  Top Layer w10: Q10.1@4941.38,3717.4 4947.6,3717.4 v2(4985,3680) ; v2(5525,3160) 5551.47,3186.47 U17.10@5551.47,3201.26
  Bottom Layer w10: v2(4985,3680) 5005,3680 v2(5525,3160)
$1N11203: L3.2 R14.1 U17.8 | length 826.2
  Top Layer w10: U17.8@5551.47,3280 5580.77,3280 5685.77,3385 5835,3385 v2(5915,3465) ; v2(5935,3585) 5990,3640 R14.1@5990,3648.22
  Top Layer w39.37: L3.2@5829.89,3620 5858.1,3648.22 R14.1@5990,3648.22
  Bottom Layer w10: v2(5915,3465) 5915,3565 v2(5935,3585)
$1N11223: R15.1 U17.6 | length 90
  Top Layer w10: R15.1@5462.04,3360 5550.21,3360 U17.6@5551.47,3358.74
$3N7835: R26.2 U4.3 | length 111.3
  Top Layer w19.68: U4.3@6658.4,4852.32 6658.4,4961.36 R26.2@6660,4962.96
$3N8722: H1.2 R29.1 | length 97.9
  Top Layer w10: R29.1@6900,5452.04 6987.96,5452.04 H1.2@6995,5445
$3N9436: H5.2 R30.1 | length 104.1
  Top Layer w10: H5.2@6805,5345 6827.04,5322.96 R30.1@6900,5322.96
$3N9496: H6.2 R31.1 | length 116.6
  Top Layer w10: R31.1@6185,5367.96 6212.96,5340 H6.2@6290,5340
$5N15455: R33.1 U8.7 | length 85.4
  Top Layer w10: U8.7@4002.91,4307.63 4013.07,4317.79 R33.1@4013.07,4388.87
$5N15668: R34.1 U8.6 | length 73.2
  Top Layer w10: R34.1@4051.15,4388.87 4051.15,4322.86 U8.6@4056.23,4317.79
$5N15673: R35.1 U8.5 | length 77.9
  Top Layer w10: R35.1@4090.5,4390.14 4090.5,4335.56 U8.5@4107,4319.06
$5N15678: R36.1 U8.4 | length 95
  Top Layer w10: R36.1@4131.12,4390.14 4131.12,4329.21 U8.4@4155.24,4305.09
$5N15683: R37.1 U8.3 | length 89
  Top Layer w10: R37.1@4170.47,4387.6 4198.4,4359.68 U8.3@4198.4,4310.17
$5N15688: R38.1 U8.2 | length 97
  Top Layer w10: R38.1@4211.1,4393.95 4211.1,4377.82 4249.18,4339.73 U8.2@4249.18,4312.71
$5N15693: R39.1 U8.1 | length 111.3
  Top Layer w10: R39.1@4249.18,4390.14 4249.18,4368.56 U8.1@4312.65,4305.09
$5N15698: R40.1 U8.15 | length 352.2
  Top Layer w10: U8.15@4250.45,4094.37 4250.45,4165.46 4335.5,4250.51 4335.5,4333.02 4287.26,4381.26 R40.1@4287.26,4391.41
$5N16421: R56.1 U9.15 | length 366.6
  Top Layer w10: U9.15@4795.81,4084.64 4795.81,4156.57 4888.05,4248.82 4888.05,4340.21 4838.97,4389.3 R56.1@4835.59,4389.3
$5N16423: R55.1 U9.1 | length 107.7
  Top Layer w10: R55.1@4797.08,4390.14 4797.08,4374.01 4848.7,4322.39 U9.1@4848.7,4303.82
$5N16425: R54.1 U9.2 | length 107.1
  Top Layer w10: R54.1@4754.77,4390.14 4798.77,4346.14 U9.2@4798.77,4301.29
$5N16427: R53.1 U9.3 | length 93.9
  Top Layer w10: R53.1@4719.22,4387.6 4743.77,4363.06 U9.3@4743.77,4303.82
$5N16429: R52.1 U9.4 | length 86.6
  Top Layer w10: R52.1@4676.91,4390.14 4676.91,4333.44 U9.4@4698.07,4312.29
$5N16431: R51.1 U9.5 | length 82.4
  Top Layer w10: R51.1@4637.14,4389.3 4648.14,4378.3 U9.5@4648.14,4311.44
$5N16433: R50.1 U9.6 | length 81.8
  Top Layer w10: R50.1@4599.05,4387.6 4602.44,4384.22 U9.6@4602.44,4307.21
$5N16435: R49.1 U9.7 | length 85.5
  Top Layer w10: U9.7@4558.43,4305.52 R49.1@4558.43,4390.99
$5N16681: R64.1 U10.15 | length 358.6
  Top Layer w10: U10.15@5353.36,4086.62 5353.36,4181.82 5428.25,4256.72 5428.25,4344.3 5385.09,4387.46 R64.1@5376.21,4387.46
$5N16683: R63.1 U10.1 | length 102.5
  Top Layer w10: R63.1@5337.56,4387.46 5337.56,4371.1 U10.1@5398.49,4310.17
$5N16685: R62.1 U10.2 | length 99.9
  Top Layer w10: R62.1@5298.63,4391.41 5298.63,4358.69 5338.69,4318.63 U10.2@5338.69,4308.06
$5N16687: R61.1 U10.3 | length 94.7
  Top Layer w10: R61.1@5259.99,4386.76 5259.99,4360.1 5295.53,4324.56 U10.3@5295.53,4306.79
$5N16689: R60.1 U10.4 | length 88
  Top Layer w10: R60.1@5218.1,4388.03 5218.1,4344.87 U10.4@5249.83,4313.13
$5N16691: R59.1 U10.5 | length 88.4
  Top Layer w10: R59.1@5178.75,4390.57 5178.75,4330.9 U10.5@5199.06,4310.59
$5N16693: R58.1 U10.6 | length 76.2
  Top Layer w10: U10.6@5143.2,4314.4 R58.1@5143.2,4390.57
$5N16695: R57.1 U10.7 | length 86.9
  Top Layer w10: U10.7@5094.97,4306.79 5094.97,4382.95 R57.1@5102.58,4390.57
$5N16941: R72.1 U11.15 | length 579.3
  Top Layer w10: U11.15@5892.99,4083.15 5892.99,4122.99 v1(5920,4150) ; R72.1@5925.02,4389.27 5950.73,4389.27 5970,4370 v1(5970,4250) ; v1(6065,4155) v1(6065,4235)
  Bottom Layer w10: v1(5920,4150) 6060,4150 v1(6065,4155) ; v1(5970,4250) 5985,4235 v1(6065,4235)
$5N16943: R71.1 U11.1 | length 109
  Top Layer w10: R71.1@5886.72,4388.31 5886.72,4368.85 5937.49,4318.07 U11.1@5937.49,4300.3
$5N16945: R70.1 U11.2 | length 103.9
  Top Layer w10: R70.1@5846.94,4390.85 5846.94,4361.23 5893.49,4314.68 U11.2@5893.49,4306.22
$5N16947: R69.1 U11.3 | length 102.2
  Top Layer w10: R69.1@5806.32,4392.54 5810.55,4388.31 5810.55,4364.61 5842.71,4332.46 U11.3@5842.71,4305.38
$5N16949: R68.1 U11.4 | length 95.6
  Top Layer w10: R68.1@5767.39,4388.31 5767.39,4327.38 U11.4@5791.94,4302.84
$5N16951: R67.1 U11.5 | length 89.1
  Top Layer w10: R67.1@5728.47,4390 5728.47,4324.84 U11.5@5745.39,4307.91
$5N16953: R66.1 U11.6 | length 87.6
  Top Layer w10: R66.1@5687.85,4390.85 5687.85,4316.38 U11.6@5697.15,4307.07
$5N16955: R65.1 U11.7 | length 96.9
  Top Layer w10: U11.7@5641.3,4296.91 5650.61,4306.22 R65.1@5650.61,4390
$5N17201: R80.1 U12.15 | length 332.1
  Top Layer w10: U12.15@4244.72,4802.46 4250,4807.74 v1(4250,4875) ; R80.1@4279.42,5115.61 4279.42,5085.58 v1(4285,5080)
  Bottom Layer w10: v1(4250,4875) 4285,4910 v1(4285,5080)
$5N17203: R79.1 U12.1 | length 115.1
  Top Layer w10: R79.1@4241.7,5116.16 4245.16,5112.7 4245.16,5079.55 4289.36,5035.34 U12.1@4289.36,5020.83
$5N17205: R78.1 U12.2 | length 103.3
  Top Layer w10: R78.1@4200.95,5117.54 4200.26,5116.85 4200.26,5081.62 4238.94,5042.94 U12.2@4238.94,5030.5
$5N17207: R77.1 U12.3 | length 110.2
  Top Layer w10: R77.1@4162.27,5116.85 4162.27,5081.62 4189.9,5053.99 U12.3@4189.9,5018.07
$5N17209: R76.1 U12.4 | length 98.4
  Top Layer w10: R76.1@4120.82,5114.08 4120.82,5056.75 U12.4@4149.83,5027.74
$5N17211: R75.1 U12.5 | length 78
  Top Layer w10: R75.1@4083.52,5116.16 4083.52,5045.01 U12.5@4088.36,5040.17
$5N17213: R74.1 U12.6 | length 90.3
  Top Layer w10: R74.1@4039.31,5116.85 4039.31,5040.17 U12.6@4048.98,5030.5
$5N17215: R73.1 U12.7 | length 90.2
  Top Layer w10: U12.7@3995.11,5031.88 3995.11,5106.48 R73.1@4006.16,5117.54
$5N17461: R88.1 U13.15 | length 333.9
  Top Layer w10: v1(4790,4870) 4790,4803.84 U13.15@4791.39,4802.46 ; R88.1@4821.22,5115.61 4821.22,5088.78 v1(4830,5080)
  Bottom Layer w10: v1(4790,4870) 4830,4910 v1(4830,5080)
$5N17463: R87.1 U13.1 | length 132.4
  Top Layer w10: R87.1@4783.4,5115.1 4783.4,5087.47 4842.81,5028.07 U13.1@4842.81,5007.34
$5N17465: R86.1 U13.2 | length 107.5
  Top Layer w10: R86.1@4744.57,5116.33 4744.57,5084.25 4792.23,5036.58 U13.2@4792.23,5028.6
$5N17467: R85.1 U13.3 | length 106.2
  Top Layer w10: R85.1@4707.27,5114.26 4707.27,5098.12 4741.8,5063.58 U13.3@4741.8,5022.39
$5N17469: R84.1 U13.4 | length 112.9
  Top Layer w10: R84.1@4663.75,5116.33 4696.21,5083.86 U13.4@4696.21,5016.86
$5N17471: R83.1 U13.5 | length 98.7
  Top Layer w10: R83.1@4625.76,5115.64 4647.17,5094.22 U13.5@4647.17,5025.84
$5N17473: R82.1 U13.6 | length 90.1
  Top Layer w10: R82.1@4584.31,5118.4 4593.29,5109.42 U13.6@4593.29,5032.06
$5N17475: R81.1 U13.7 | length 95.2
  Top Layer w10: U13.7@4545.63,5021 4545.63,5114.26 R81.1@4547.01,5115.64
$5N17991: R96.1 U14.15 | length 363.2
  Top Layer w10: U14.15@5338.05,4802.46 5340,4804.41 v1(5340,4880) ; R96.1@5368.85,5115.61 5404.45,5080 v1(5410,5080)
  Bottom Layer w10: v1(5340,4880) 5410,4950 v1(5410,5080)
$5N17993: R95.1 U14.1 | length 111.2
  Top Layer w10: R95.1@5329.89,5114.32 5329.89,5088.77 5386.53,5032.12 U14.1@5386.53,5026.6
$5N17995: R94.1 U14.2 | length 113.2
  Top Layer w10: R94.1@5289.14,5114.32 5289.14,5085.31 5338.87,5035.58 U14.2@5338.87,5021.76
$5N17997: R93.1 U14.3 | length 105.7
  Top Layer w10: R93.1@5248.38,5117.78 5250.45,5115.7 5250.45,5085.31 5288.45,5047.32 U14.3@5288.45,5028.67
$5N17999: R92.1 U14.4 | length 112
  Top Layer w10: R92.1@5212.46,5116.4 5212.46,5042.48 U14.4@5239.4,5015.55
$5N18001: R91.1 U14.5 | length 86
  Top Layer w10: R91.1@5173.09,5117.09 5173.09,5048.7 U14.5@5185.52,5036.27
$5N18003: R90.1 U14.6 | length 94.5
  Top Layer w10: R90.1@5133.03,5115.7 5133.03,5034.89 U14.6@5142.7,5025.22
$5N18005: R89.1 U14.7 | length 101.1
  Top Layer w10: U14.7@5083.29,5019.86 5094.35,5030.91 R89.1@5094.35,5116.4
$5N18251: R104.1 U15.15 | length 584.5
  Top Layer w10: U15.15@5884.72,4802.46 5884.72,4829.41 5920.31,4865 v1(5950,4865) ; R104.1@5914.37,5115.61 5975,5054.98 v1(5975,5020) ; v1(6035,4800) v1(6035,4945)
  Bottom Layer w10: v1(5950,4865) 6015,4800 v1(6035,4800) ; v1(5975,5020) 5975,5005 v1(6035,4945)
$5N18253: R103.1 U15.1 | length 122.2
  Top Layer w10: R103.1@5876.27,5116.22 5876.27,5086.29 5931.07,5031.49 U15.1@5931.07,5016.75
$5N18255: R102.1 U15.2 | length 116.8
  Top Layer w10: R102.1@5836.67,5115.76 5836.67,5090.43 5889.63,5037.48 U15.2@5889.63,5020.9
$5N18257: R101.1 U15.3 | length 112.9
  Top Layer w10: R101.1@5793.38,5112.54 5793.38,5084.91 5835.75,5042.54 U15.3@5835.75,5017.22
$5N18259: R100.1 U15.4 | length 119.9
  Top Layer w10: R100.1@5755.39,5115.88 5755.39,5115.37 5771.02,5099.74 5771.02,5036.01 U15.4@5794.76,5012.26
$5N18261: R99.1 U15.5 | length 104.2
  Top Layer w10: R99.1@5718.09,5117.95 5718.09,5101.81 5741.92,5077.98 U15.5@5741.92,5023.66
$5N18263: R98.1 U15.6 | length 97.4
  Top Layer w10: U15.6@5680.79,5020.55 R98.1@5680.79,5117.95
$5N18265: R97.1 U15.7 | length 98.9
  Top Layer w10: U15.7@5634.16,5018.48 5634.16,5108.62 R97.1@5640.38,5114.84
$5N19648: U10.14 U11.9 | length 443
  Top Layer w10: U10.14@5298.05,4076.63 5298.05,4034.74 5362.79,3970 5536.69,3970 5597.63,4030.93 U11.9@5597.63,4080.43
$5N19653: U9.14 U10.9 | length 427.8
  Top Layer w10: U9.14@4748.4,4084.24 4749.67,4082.97 4749.67,4023.31 4804.25,3968.73 4921.04,3968.73 U10.9@5042.9,4090.59
$5N19658: U8.14 U9.9 | length 449.8
  Top Layer w10: U8.14@4202.56,4081.7 4206.37,4077.9 4206.37,4010.62 4249.53,3967.46 4410.74,3967.46 4499.6,4056.32 U9.9@4499.6,4085.51
$5N19671: U14.14 U15.9 | length 443
  Top Layer w10: U14.14@5288.79,4799.26 5288.79,4757.37 5353.53,4692.63 5527.43,4692.63 5588.37,4753.56 U15.9@5588.37,4803.07
$5N19676: U13.14 U14.9 | length 427.2
  Top Layer w10: U13.14@4736.35,4800.14 U13.14@4737.2,4800.99 ; U13.14@4740.41,4805.61 4740.41,4745.94 4794.99,4691.36 4911.78,4691.36 U14.9@5033.64,4813.22